# Altium PCB TX.PcbDoc
Units mm, origin at the board's own origin, x right, y up, seen from the top; angles counter-clockwise.
Board outline 80 x 26 mm, 2 copper layers (Top Layer, Bottom Layer); 49 components, 37 nets, 205 pads, 55 vias.
Unrouted connection lines stored in the file: 54.
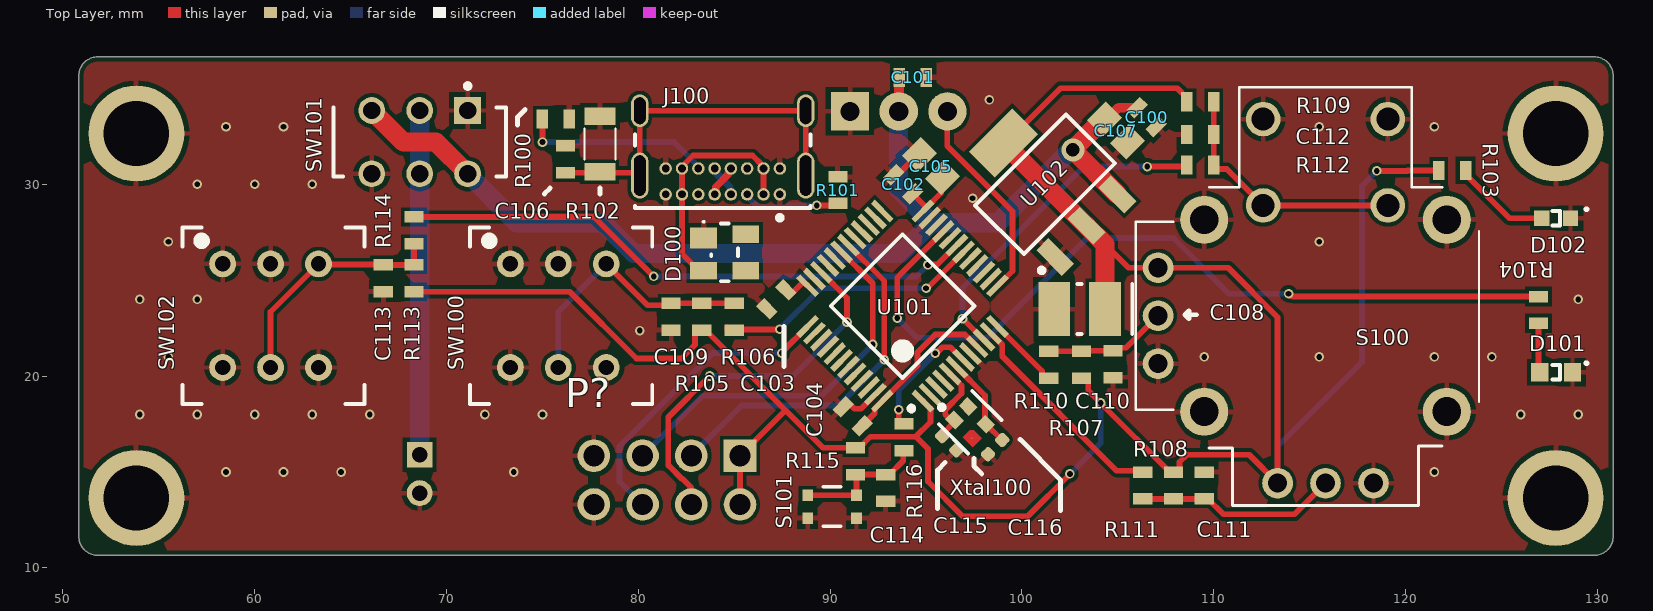
[diagram p0: Top Layer view]
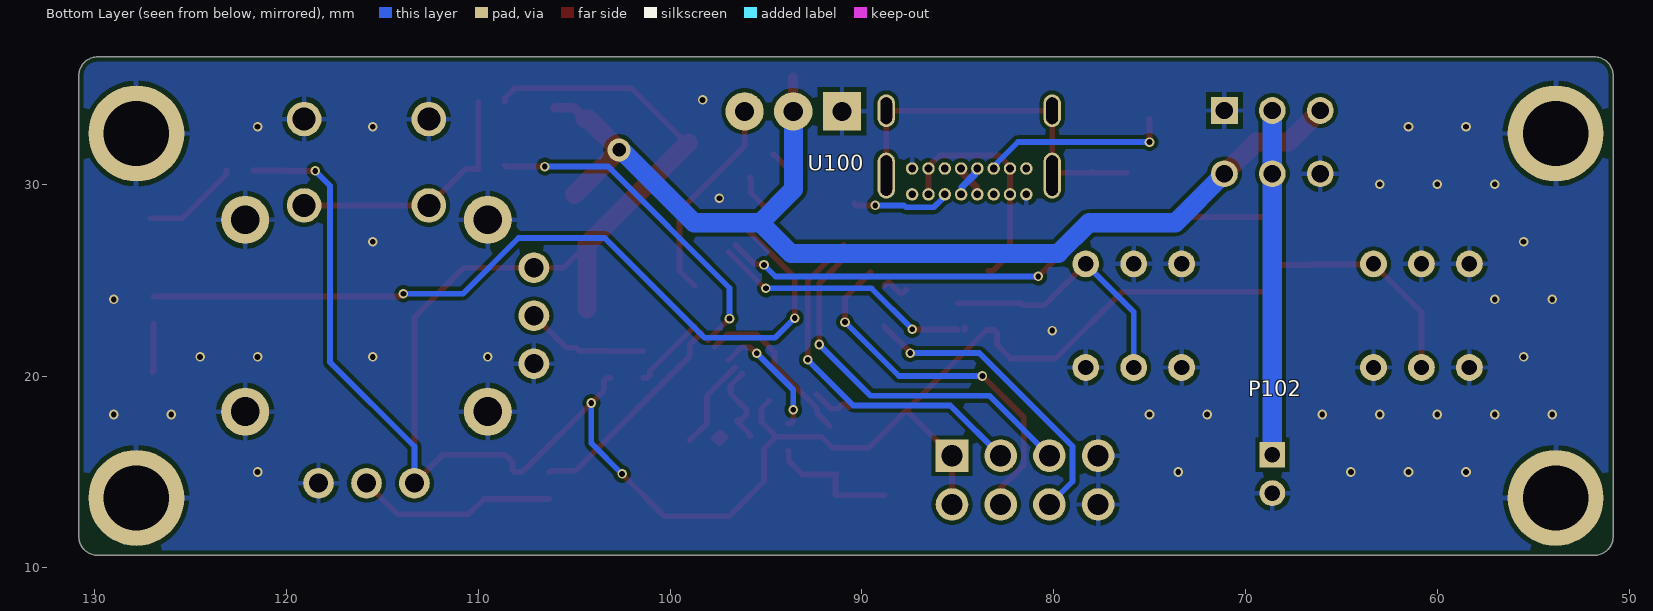
[diagram p1: Bottom Layer view, seen from below]

## Layer stack, top to bottom
Top Solder: solder mask 0.0102, Solder Resist, Dk 3.5
Top Layer: signal copper 0.0356
Dielectric 1: dielectric 0.32, FR-4, Dk 4.8
Bottom Layer: signal copper 0.0356
Bottom Solder: solder mask 0.0102, Solder Resist, Dk 3.5

## Board outline
50.825,11.65 ccw(c51.825,11.65) 51.825,10.65 129.825,10.65 ccw(c129.825,11.65) 130.825,11.65 130.825,35.65 ccw(c129.825,35.65) 129.825,36.65 51.825,36.65 ccw(c51.825,35.65) 50.825,35.65

## Design rules (kind name [scope] priority, off if disabled: settings)
BoardOutlineClearance [All] p1: gap=0.254 ignorepadtopadclearanceinfootprint=FALSE except(0: Arc-SplitContinuation Track-SplitContinuation SMDPad-SplitContinuation THPad-SplitContinuation Via-SplitContinuation Fill-SplitContinuation Poly-SplitContinuation Region-SplitContinuation Text-SplitContinuation)
Clearance [All] p1: gap=0.2 ignorepadtopadclearanceinfootprint=FALSE
DiffPairsRouting [All] p1: maxlimit=0.254 minlimit=0.254 mostfreqgap=0.254 toplayer_minwidth=0.381 toplayer_maxwidth=0.381 toplayer_prefwidth=0.381 bottomlayer_minwidth=0.381 bottomlayer_maxwidth=0.381 bottomlayer_prefwidth=0.381 maxuncoupledlength=12.7
PolygonConnect 7V_Poly [IsNamedPolygon('7V')] p1: connectstyle=Relief reliefconductorwidth=1 reliefentries=2 polygonreliefangle="90 Angle" airgapwidth=0.254
PolygonConnect [All] p2: thpad.connectstyle=Relief thpad.reliefconductorwidth=0.254 thpad.reliefentries=4 thpad.polygonreliefangle="90 Angle" thpad.airgapwidth=0.254 smdpad.connectstyle=Relief smdpad.reliefconductorwidth=0.254 smdpad.reliefentries=4 smdpad.polygonreliefangle="90 Angle" smdpad.airgapwidth=0.254 via.connectstyle=Direct via.reliefconductorwidth=0.254 via.reliefentries=4 via.polygonreliefangle="90 Angle" via.airgapwidth=0.254
RoutingVias [All] p1: holewidth=0.3 width=0.5 viastyle="Through Hole" minholewidth=0.3 minwidth=0.5 maxholewidth=0.3 maxwidth=1 viatemplateguid#1={624E91B9-952A-4740-B797-111CA46E8F32} viatemplatename#1=v50h30
SolderMaskExpansion [All] p1: expansion=0.102 istentingtop=FALSE
SupplyNets "Schematic Supply Nets_3" [InNet('5V')] p1: voltage=0.000
SupplyNets "Schematic Supply Nets_2" [InNet('7.4V')] p2: voltage=0.000
SupplyNets "Schematic Supply Nets_1" [InNet('GND')] p3: voltage=0.000
Width [All] p1: maxlimit=2 minlimit=0.3 preferedwidth=0.3
29 further rules are at their usual default settings.

## Classes and differential pairs
differential pair USB_D: +USB_D_P -USB_D_N

## Components (designator, comment, footprint, x,y, rotation, side; value= is the part's Value field where it differs from the comment)
C100 "1u" MLCC_0603_M 106.5,33.5 r135 top value=1µF
C101 "100n" MLCC_0603_M 94.3,35.575 r180 top value=100nF
C102 "100n" MLCC_0603_M 93.8,30 r135 top value=100nF
C103 "100n" MLCC_0603_M 87.2,24 r225 top value=100nF
C104 "100n" MLCC_0603_M 91.175,17.9 r135 top value=100nF
C105 "4.7u" MLCC_0805_M 95.25,30.95 r315 top value=4.7µF
C106 "1n" MLCC_0603_M 76.2,31.3 r270 top value=1nF
C107 "10u" MLCC_0805_M 104.9,32.8 r135 top value=10µF
C108 "TCJB226M025R0150" 1210_Tantalum 103,23.5 r180 top value=22µF
C109 "100n" MLCC_0603_M 81.7,23.1 r90 top value=100nF
C110 "100n" MLCC_0603_M 104.75,20.625 r90 top value=100nF
C111 "100n" MLCC_0603_M 109.5,14.3 r270 top value=100nF
C112 "100n" MLCC_0603_M 109.3,32.6 r0 top value=100nF
C113 "100n" MLCC_0603_M 66.7,25.1 r90 top value=100nF
C114 "100n" MLCC_0603_M 92.897,14.171 r90 top value=100nF
C115 "15p" MLCC_0402_M 96.2,16.5 r135 top value=15pF
C116 "15p" MLCC_0402_M 98.6,16.3 r45 top value=15pF
D100 "SP0503BAHT" LFUS-SOT143-4_V 84.5,26.45 r0 top value=30pF
D101 "Green" "0603 LED" 127.85,20.2 r0 top
D102 "Red" "0603 RED LED" 127.85,28.225 r0 top
J100 "USB4085-GF-A" FP-USB4085-GF-A-MFG 84.4,33.5 r180 top
P102 "S2B-PH-K-S(LF)(SN)" B5B-PH-K-S(LF)(SN) 69.15,14.9 r270 bottom
P? "8 Pos Vertical Pin Header" "8 POS Vertical Pin Header" 81.49,14.58 r180 top
R100 "5.1k" Resistor_0603_M 75.7,33.4 r180 top value=5,1k
R101 "5.1k" Resistor_0603_M 90.4,29.7 r90 top value=5,1k
R102 "1M" Resistor_1206_M 78,32.1 r270 top
R103 "200R" Resistor_0603_M 122.425,30.725 r0 top value=200
R104 "200R" Resistor_0603_M 126.925,23.45 r270 top value=200
R105 "10k" Resistor_0603_M 83.3,23.1 r270 top
R106 "100R" Resistor_0603_M 85,23.1 r270 top value=100
R107 "10k" Resistor_0603_M 103.1,20.6 r270 top
R108 "10k" Resistor_0603_M 107.9,14.3 r90 top
R109 "10k" Resistor_0603_M 109.3,34.3 r180 top
R110 "100R" Resistor_0603_M 101.4,20.6 r270 top value=100
R111 "100R" Resistor_0603_M 106.3,14.3 r90 top value=100
R112 "100R" Resistor_0603_M 109.3,31 r180 top value=100
R113 "10k" Resistor_0603_M 68.3,25.1 r270 top
R114 "100R" Resistor_0603_M 68.3,27.6 r90 top value=100
R115 "10k" Resistor_0603_M 91.322,15.571 r90 top
R116 "100R" Resistor_0603_M 93.847,16.821 r90 top value=100
S100 "THB001P" THB001P 115.825,23.15 r0 top locked value=10kR
S101 "USLPT2819DT4TR" USLPT2819DT4TR-Footprint-1 90.097,13.196 r180 top
SW100 "TL2201EEXB" TL2201EEXB-Footprint-1 75.825,23.15 r0 top
SW101 "JS202011CQN" FP-JS202011CQN-MFG 68.6,32.2 r180 top
SW102 "TL2201EEXB" TL2201EEXB-Footprint-1 60.825,23.15 r0 top
U100 "FS1000A" "2.54mm 3-pin horizontal" 93.575,39 r0 bottom
U101 "STM32F103C6T6A" STM-LQFP48_M 93.775,23.65 r135 top
U102 "AMS1117-5.0" SOT230P700X180-4N 101.2,30 r135 top
Xtal100 "ABM11-16.000MHZ-12-N1G-T" FP-ABM11-MFG 97.3,17.6 r315 top

## Footprints (in the part's own frame and the unit in brackets; to place one, negate y for a bottom-side part, rotate by r counter-clockwise, add the part's x,y. Pads: shape width x height; smd on the part's side, far side on the other; paste and mask are expansions set on the pad)
"2.54mm 3-pin horizontal" [mm]
  rect 2x2 hole 1: 1(-2.54,5.2)
  round 2 hole 1: 2(0,5.2) 3(2.54,5.2)
  body extent -8.51,-26.2 10.6,5.4, height 3.35
"8 POS Vertical Pin Header" [mm]
  rect 1.7x1.7 hole 1.1: 1(-3.81,-1.27)
  round 1.7 hole 1.1: 2(-3.81,1.27) 3(-1.27,-1.27) 4(-1.27,1.27) 5(1.27,-1.27) 6(1.27,1.27) 7(3.81,-1.27) 8(3.81,1.27)
  body extent -5.08,-2.51 5.08,2.49, height 8.03
"0603 LED" [mm] "Generic 0603 LED"
  rect 0.9x0.95 smd: 1(0.85,0) 2(-0.85,0)
  silkscreen extent -0.2,-0.38 1.6,0.5, body extent -0.8,-0.4 0.8,0.4, height 0.38
"0603 RED LED" [mm] "Generic 0603 RED LED"
  rect 0.8x0.8 smd: 1(0.75,0) 2(-0.75,0)
  silkscreen extent -0.2,-0.38 1.6,0.5, body extent -0.8,-0.4 0.8,0.4, height 0.4
1210_Tantalum [mm] "Chip Capacitor, 2-Leads, Body 3,20x2,50mm, IPC Medium Density"
  rect 1.65x2.8 smd: 1(-1.325,0) 2(1.325,0)
  silkscreen extent -2.75,-1.3 0.1,1.3, body extent -1.85,-1.43 1.85,1.5, height 2.06
B5B-PH-K-S(LF)(SN) [mm]
  rect 1.35x1.35 hole 0.8: 1(-1,0.55)
  round 1.35 hole 0.8: 2(1,0.55)
  body extent -2.92,-5.73 2.98,1.87, height 4.8
FP-ABM11-MFG [mm]
  rect 0.75x0.65 smd paste+0 mask+0: 1(-0.65,-0.5) 3(0.65,0.5) 4(-0.65,0.5)
  round 0.025 smd paste+0 mask+0: 2(0.65,-0.525)
  Top Layer region: 0.275,-0.325 0.425,-0.175 1.025,-0.175 1.025,-0.825 0.275,-0.825
  silkscreen extent -1.72,-1.22 1.07,1.22, body extent -1.18,-0.97 1.18,0.97, height 0.25
FP-JS202011CQN-MFG [mm]
  rect 1.4x1.4 hole 0.9 paste-2539.97 mask+0: 1(-2.5,-1.65)
  round 1.4 hole 0.9 paste-2539.97 mask+0: 2(0,-1.65) 3(2.5,-1.65) 4(2.5,1.65) 5(0,1.65) 6(-2.5,1.65)
  silkscreen extent -4.5,-3.05 4.5,1.8, body extent -4.6,-2.45 4.6,2.45, height 0.25
FP-USB4085-GF-A-MFG [mm]
  rrect100% 0.9x2.4 hole 2.1 slot 0.6 at 0 deg paste-2539.97 mask+0: 1(-4.325,3.045) 2(4.325,3.045)
  rrect100% 0.9x1.7 hole 1.4 slot 0.6 at 0 deg paste-2539.97 mask+0: 3(-4.325,-0.335) 4(4.325,-0.335)
  round 0.65 hole 0.4 paste-2539.97 mask+0: A1(-2.975,4.025) A4(-2.125,4.025) A5(-1.275,4.025) A6(-0.425,4.025) A7(0.425,4.025) A8(1.275,4.025) A9(2.125,4.025) A12(2.975,4.025) B1(2.975,2.675) B4(2.125,2.675) B5(1.275,2.675) B6(0.425,2.675) B7(-0.425,2.675) B8(-1.275,2.675) B9(-2.125,2.675) B12(-2.975,2.675)
  silkscreen extent -4.57,0.89 4.57,5.37, body extent -4.87,-4.83 4.87,4.83, height 0.25
LFUS-SOT143-4_V [mm] "SOT143, 4-Leads, Body 3.04x1.4mm, Pitch 1.90mm"
  rect 1.4x1.1 smd: 1(-1.1,0.75)
  rect 1.4x0.9 smd: 2(-1.1,-0.95) 3(1.1,-0.95) 4(1.1,0.95)
  silkscreen extent -1.15,-1.5 0.7,1.65, body extent -0.7,-1.52 0.7,1.52, height 1.22
MLCC_0402_M [mm]
  rrect49% 0.63x0.61 smd: 1(-0.525,0) 2(0.525,0)
  body extent -0.5,-0.25 0.5,0.25, height 0.55
MLCC_0603_M [mm]
  rect 0.6x1 smd: 1(-0.7,0) 2(0.7,0)
  body extent -0.8,-0.4 0.8,0.4, height 0.92
MLCC_0805_M [mm] "Chip Capacitor, 2-Leads, Body 2,00x1,25mm, IPC Medium Density"
  rect 1.2x1.4 smd: 1(-0.85,0) 2(0.85,0)
  body extent -1.05,-0.67 1.05,0.67, height 1.35
Resistor_0603_M [mm]
  rect 0.6x1 smd: 1(-0.7,0) 2(0.7,0)
  body extent -0.8,-0.4 0.8,0.4, height 0.45
Resistor_1206_M [mm]
  rect 0.9x1.6 smd: 1(-1.45,0) 2(1.45,0)
  silkscreen extent -0.8,-0.8 0.8,0.8, body extent -1.6,-0.83 1.6,0.83, height 0.56
SOT230P700X180-4N [mm] "SOT-223 based on AP2114H-3.3TRG1"
  rect 1.9x0.9 smd: 1(-3.05,2.3) 2(-3.05,0) 3(-3.05,-2.3)
  rect 1.9x3.2 smd: 4(3.05,0)
  silkscreen extent -3.17,-3.35 1.8,3.42, body extent -3.5,-3.35 3.5,3.35, height 1.8
STM-LQFP48_M [mm] "QFP, 48-Leads, Body 7x7mm, Pitch 0.5mm, IPC Low Density"
  rect 1.4x0.3 smd: 1(-4.25,2.75) 2(-4.25,2.25) 3(-4.25,1.75) 4(-4.25,1.25) 5(-4.25,0.75) 6(-4.25,0.25) 7(-4.25,-0.25) 8(-4.25,-0.75) 9(-4.25,-1.25) 10(-4.25,-1.75) 11(-4.25,-2.25) 12(-4.25,-2.75) 25(4.25,-2.75) 26(4.25,-2.25) 27(4.25,-1.75) 28(4.25,-1.25) 29(4.25,-0.75) 30(4.25,-0.25) 31(4.25,0.25) 32(4.25,0.75) 33(4.25,1.25) 34(4.25,1.75) 35(4.25,2.25) 36(4.25,2.75)
  rect 0.3x1.4 smd: 13(-2.75,-4.25) 14(-2.25,-4.25) 15(-1.75,-4.25) 16(-1.25,-4.25) 17(-0.75,-4.25) 18(-0.25,-4.25) 19(0.25,-4.25) 20(0.75,-4.25) 21(1.25,-4.25) 22(1.75,-4.25) 23(2.25,-4.25) 24(2.75,-4.25) 37(2.75,4.25) 38(2.25,4.25) 39(1.75,4.25) 40(1.25,4.25) 41(0.75,4.25) 42(0.25,4.25) 43(-0.25,4.25) 44(-0.75,4.25) 45(-1.25,4.25) 46(-1.75,4.25) 47(-2.25,4.25) 48(-2.75,4.25)
  silkscreen extent -4.22,-2.65 2.65,3.57, body extent -3.5,-3.5 3.5,3.5, height 1.6
THB001P [mm]
  round 1.8 hole 1.2: B1A(-3.25,10.25) B1B(3.25,10.25) B2A(-3.25,5.75) B2B(3.25,5.75)
  round 1.6 hole 1: H1(-2.5,-8.73) H2(0,-8.73) H3(2.5,-8.73) V1(-8.73,2.5) V2(-8.73,0) V3(-8.73,-2.5)
  round 2.5 hole 1.5: S1(-6.325,5) S2(-6.325,-5) S3(6.325,-5) S4(6.325,5)
  silkscreen extent -9.9,-9.9 8,11.9, body extent -9.67,-9.67 7.6,11.6, height 19.5
TL2201EEXB-Footprint-1 [mm]
  round 1.4 hole 0.8: 1(-2.5,2.7) 2(0,2.7) 3(2.5,2.7) 4(-2.5,-2.7) 5(2.5,-2.7) 6(0,-2.7)
  silkscreen extent -4.6,-4.6 4.9,4.6, body extent -4.25,-4.25 4.55,4.25, height 14.2
USLPT2819DT4TR-Footprint-1 [mm]
  rect 0.55x0.6 smd: 1(-1.275,0.6) 2(1.275,0.6) 3(-1.275,-0.59) 4(1.275,-0.59)
  silkscreen extent -0.46,-1.02 0.46,1.03, body extent -1.5,-0.94 1.5,0.96, height 0.43

## Part data
C100: library part CMP-001-0565-1, "MLCC, 0603, 1u, 10%, 50V, X5R", Capacitor Type=Ceramic, Case/Package=0603, Dielectric=X5R, Manufacturer=Any, Tolerance=10%, Voltage=50V, Mount=SMD, Part number="MLCC, 0603, 1u, 10%, 50V, X5R", RoHS=Yes
C101 C102 C103 C104 C109 C110 C111 C112 C113 C114: library part CMP-001-0815-1, "MLCC, 0603, 100n, 10%, 50V, X7R", Capacitor Type=Ceramic, Case/Package=0603, Dielectric=X7R, Manufacturer=Any, Tolerance=10%, Voltage=50V, Mount=SMD, Part number="MLCC, 0603, 100n, 10%, 50V, X7R", RoHS=Yes
C105: library part CMP-001-1830-1, "MLCC, 0805, 4.7u, 20%, 50V, X5R", Capacitor Type=Ceramic, Case/Package=0805, Dielectric=X5R, Manufacturer=Any, Tolerance=20%, Voltage=50V, Mount=SMD, Part number="MLCC, 0805, 4.7u, 20%, 50V, X5R", RoHS=Yes
C106: library part CMP-001-0786-1, "MLCC, 0603, 1n, 10%, 50V, X7R", Capacitor Type=Ceramic, Case/Package=0603, Dielectric=X7R, Manufacturer=Any, Tolerance=10%, Voltage=50V, Mount=SMD, Part number="MLCC, 0603, 1n, 10%, 50V, X7R", RoHS=Yes
C107: library part CMP-001-0829-2, "MLCC, 0805, 10u, 10%, 50V, X5R", Capacitor Type=Ceramic, Case/Package=0805, Dielectric=X5R, Manufacturer=Any, Tolerance=10%, Voltage=50V, Mount=SMD, Part number="MLCC, 0805, 10u, 10%, 50V, X5R", RoHS=Yes
C108: library part CMP-0001-00036-4, "Cap Tant Solid 22uF 25V B CASE 20% (3.5 X 2.8 X 1.9mm) SMD 3528-21 0.15 Ohm 105°C T/R", Capacitance=22uF, Capacitor Type=Molded, Case Code (Imperial)=1210, Case Code (Metric)=3528, Dielectric=X5R, ESR (Equivalent Series Resistance)=150mR, Manufacturer="AVX Corporation", Max Operating Temperature=105°C, Min Operating Temperature=-55°C, Package Quantity=2000, Tolerance=20%, Voltage Rating=25V, Case/Package=1210, Depth=2.8mm, Features="General Purpose", Height=1.9mm, Height - Seated (Max)=0.083inch, Length=0.138inch, Life (Hours)=2000Hour, Mount="Surface Mount", Packaging="Tape and Reel", Part number=TCJB226M025R0150, Radiation Hardening=No, REACH SVHC="No SVHC", RoHS=Yes, Termination=SMD/SMT, Voltage Rating (DC)=25V, Width=0.11inch
C115 C116: library part CMP-001-1853-1, "MLCC, 0402, 15p, 10%, 25V, C0G/NP0", Capacitance=15pF, Capacitor Type=Ceramic, Case Code (Imperial)=0402, Case Code (Metric)=1005, Dielectric=C0G, Manufacturer=Any, Max Operating Temperature=125°C, Min Operating Temperature=-55°C, Package Quantity=1, Temperature Coefficient=300ppm/°C, Tolerance=10%, Voltage=25V, Voltage Rating=25, Case/Package=0402, Contact Plating=Tin, Depth=0.5mm, Height=0.5mm, Length=1mm, Material=Ceramic, Mount="Surface Mount", Packaging="Tape and Reel", Part number="MLCC, 0402, 15p, 10%, 25V, C0G/NP0", Radiation Hardening=No, RoHS=Yes, Thickness=0.022inch, Width=0.02inch
D100: library part CMP-ROOT-01259-1, "SP050xBA Series 8.5 V 30 pF Triple Uni-Directional TVS Avalanche Diode-SOT143-4", Breakdown Voltage=5.5V, Case/Package=SOT-143, Clamping Voltage=6.8V, Leakage Current=100nA, Manufacturer="Littelfuse Inc.", Max Operating Temperature=125°C, Max Power Dissipation=225mW, Min Operating Temperature=-40°C, Power Line Protection=No, Voltage Rating (DC)=5V, China RoHS=Compliant, Composition=Zener, Depth=1.4mm, Diode Type=Avalanche, Direction=Unidirectional, Element Configuration="Common Anode", ESD Protection=Yes, Height=1.22mm, Lead Free="Lead Free", Length=3.04mm, Lifecycle Status=Production, Max Reverse Leakage Current=100nA, Mount=SMD, Mounting Technology="Surface Mount", Number of Channels=3, Number of Elements=3, Number of Terminals=4, Number of Unidirectional Channels=3, Operating Supply Voltage=5.5V, Part number=SP0503BAHT, Peak Pulse Power=225mW, Pins=4, Polarity=Unidirectional, Power Dissipation=225mW, Radiation Hardening=No, REACH SVHC=Yes, Reverse Standoff Voltage=5.5V, RoHS=Compliant, Schedule B="8536300000, 8536300000", Termination=SMD/SMT, Width=1.4mm, Working Voltage=5.5V
D101: library part CMP-ROOT-00024-1, "Generic green 0603 LED", Case/Package=0603, Manufacturer=Any, Part number="Any Green 0603 LED", Color=Green, Mount=SMD, RoHS=Yes
D102: library part CMP-ROOT-00025-2, "Generic red 0603 LED", Case/Package=0603, Manufacturer=Any, Part number="Any Red 0603 LED", Color=Red, Mount=SMD, RoHS=Yes
J100: library part CMP-001-1800-1, "USB Connector, 16 Contact(s), Female, Right Angle, Solder Terminal, Locking, Receptacle", Current Rating=4.25A, Flammability Rating="UL94 V-0", Insulation Color=Black, Manufacturer=GCT, Max Operating Temperature=85°C, Min Operating Temperature=-40°C, Part number=USB4800-03-A, Voltage Rating=20V, Connector Type=USB, Contact Material="Copper Alloy", Contact Plating=Gold, Gender=Receptacle, Height=3.66mm, Mating Cycles=10000, Mount=TH, Mounting Technology="Through Hole,Horizontal", Number of Contacts=16, Number of Ports=1, Number of Positions=16, Orientation="Right Angle", Packaging="Tape and Reel", Pins=16, RoHS=Yes, Series=USB4085, Shielding=Shielded, Standoff Height=3.5mm, Termination=Solder, USB PD=3.2, USB Standard="USB 2.0"
P102: library part CMP-ROOT-00728-2, "Conn Shrouded Header (4 Sides) HDR 2 POS 2mm Solder RA Thru-Hole Box", Color=Natural,White, Contact Resistance=20mR, Current Rating=2A, Flammability Rating="UL94 V-0", Housing Color=White, Insulation Resistance=1GR, Manufacturer="JST Sales America Inc.", Max Operating Temperature=85°C, Max Voltage Rating (AC)=100V, Min Operating Temperature=-25°C, Connector Type="Male Pin", Contact Material=Tin,Brass,Bronze, Contact Mating Length=0.13inch, Contact Plating=Tin,Copper, Contact Type="Male Pin", Depth=7.6mm, Fastening Type=Detent, Gender=Male, Height=9.4mm, Housing Material=Polyamide, Lead Free="Lead Free", Lead Pitch=2mm, Length=5.9mm, Max Current Rating=2A, Max Voltage Rating (DC)=100V, Mount="Through Hole", Number of Contacts=2, Number of Pins=2, Number of Poles=2, Number of Positions=2, Number of Rows=1, Orientation="Right Angle", Packaging=Bulk, Part number=S2B-PH-K-S(LF)(SN), Pitch=2mm, REACH SVHC="No SVHC", RoHS=Yes, Series=PH, Termination=Solder, Voltage Rating=100V, Voltage Rating (AC)=100V, Width=4.5mm, Working Voltage=100V
P?: library part CMP-ROOT-00235-2, "Connector Header Through Hole 8 position 0.100\" (2.54mm)", Color=Black, Current Rating=3A, Insulation Resistance=5GR, Manufacturer="Amphenol ICC (FCI)", Max Operating Temperature=125°C, Max Voltage Rating (AC)=1.5kV, Min Operating Temperature=-65°C, Package Quantity=100, Part number=67997-208HLF, Connector Type="Male Pin", Contact Gender=Male, Contact Material=Bronze, Contact Mating Length=0.23inch, Contact Plating=Gold,GXT, Contact Post Length=3.05mm, Depth=4.83mm, Gender=Male, Housing Color=Black, Housing Material=Thermoplastic, Length=10.16mm, Mount="Through Hole", Number of Contacts=8, Number of Positions=8, Number of Rows=2, Orientation=Straight, Packaging=Bulk, Pins=8, Pitch=2.54mm, Radiation Hardening=No, REACH SVHC="No SVHC", RoHS=Yes, Row Spacing=0.1inch, Termination=Solder, Voltage Rating=1.5kV
R100 R101: library part CMP-001-0094-2, "Resistor, 0603, 5.1k, 1%, 1/10W", Case/Package=0603, Manufacturer=Any, Power=100mW, Tolerance=1%, Mount=SMD, Part number="Resistor, 0603, 5.1k, 1%, 1/10W", RoHS=Yes
R102: library part CMP-0001-00051-1, "Resistor, 1206, 1M, 1%, 1/4W", Case/Package=1206, Manufacturer=Any, Mount=SMD, Part number=Any, RoHS=Yes
R103 R104: library part CMP-001-0060-2, "Resistor, 0603, 200R, 1%, 1/10W", Case/Package=0603, Manufacturer=Any, Power=100mW, Tolerance=1%, Mount=SMD, Part number="Resistor, 0603, 200R, 1%, 1/10W", RoHS=Yes
R105 R107 R108 R109 R113 R115: library part CMP-001-0101-2, "Resistor, 0603, 10k, 1%, 1/10W", Case/Package=0603, Manufacturer=Any, Power=100mW, Tolerance=1%, Mount=SMD, Part number="Resistor, 0603, 10k, 1%, 1/10W", RoHS=Yes
R106 R110 R111 R112 R114 R116: library part CMP-001-0054-5, "Resistor, 0603, 100R, 1%, 1/10W", Case/Package=0603, Manufacturer=Any, Power=100mW, Tolerance=1%, Mount=SMD, Part number="Resistor, 0603, 100R, 1%, 1/10W", RoHS=Yes
S100: library part CMPL-001-A00000-7, "Multi-Directional Thumbstick, 2 Axis, Center Momentary Switch, 12VDC, THB Series", Manufacturer=Littelfuse, Max Operating Temperature=70°C, Min Operating Temperature=-10°C, Operating Force=715gf, Package=None, Voltage Rating (DC)=12V, Actuator Type=Joystick, Mount=TH, Mounting Technology="Through Hole", Part number=THB001P, Pins=12, Price=None, RoHS=Yes, Termination="PC Pin"
S101: library part CMP-ROOT-01290-1, "Keypad Switch, SPST, 0.05A, 1.96N, Solder Terminal, Panel Mount", Case/Package=Non-standard, Color=Black, Contact Current Rating=50mA, Manufacturer="TE Connectivity ALCOSWITCH Switches", Max Operating Temperature=85°C, Min Operating Temperature=-40°C, Operating Force=1.96N, China RoHS=Compliant, Contact Material="Stainless Steel", Contact Plating=Silver, Housing Material=Polyethylene, Lifecycle Status=Production, Max Current Rating=50mA, Mount=SMD, Packaging="Tape & Reel", Part number=USLPT2819DT4TR, REACH SVHC=Yes, RoHS=Compliant, Throw Configuration=SPST
SW100 SW102: library part CMP-ROOT-01258-1, "Pushbutton Switch, DPDT, ON-ON, 100 mA, 30V DC, PC Pin, TL2201 Series", Case/Package=Non-standard, Contact Resistance=100mΩ, Current Rating=100mA, Insulation Resistance=100MΩ, Manufacturer=E-Switch, Max Voltage Rating (DC)=30V, Actuator Length=5.5118mm, Actuator Material=Acetal, Contact Plating=Silver, Electrical Life=10kcycles, Height=8.509mm, Length=8.509mm, Lifecycle Status=Production, Max Current Rating=100mA, Mount=TH, Mounting Technology="Through Hole", Number of Positions=2, Part number=TL2201EEXB, Pins=6, REACH SVHC=Yes, RoHS=Compliant, Switch Function=On-On, Termination="PC Pin", Throw Configuration=DPDT, Voltage Rating (DC)=30V
SW101: library part CMP-ROOT-01260-1, "Slide Switch, 1 Positions, Dpdt, Latched, 0.3A, 6Vdc, 6 Pcb Hole Cnt, Solder Terminal, Through", Case/Package=Non-standard, Color=Black, Contact Current Rating=300mA, Contact Resistance=70mΩ, Flammability Rating="UL94 V-0", Insulation Resistance=100MΩ, Manufacturer=C&K, Max Operating Temperature=85°C, Max Voltage Rating (DC)=6V, Min Operating Temperature=-40°C, Actuator Length=2.0066mm, Actuator Material=Nylon, Contact Plating=Silver, Current Rating=300mA, Depth=3.6mm, Electrical Life=5kcycles, Height=3.5mm, Housing Material=Nylon, Illumination Type=Non-Illuminated, Lead Free="Lead Free", Length=9mm, Life (Cycles)=5kcycles, Lifecycle Status=Production, Max Current Rating=300mA, Mount=SMD, Mounting Technology="Through Hole", Number of Positions=1, Orientation=Vertical, Packaging=Bulk, Part number=JS202011CQN, Pins=6, Radiation Hardening=No, REACH SVHC=Yes, RoHS=Compliant, Switch Function=On-On, Switch Travel=2mm, Terminal Material=Brass, Termination="PC Pins", Throw Configuration=DPDT, Voltage Rating (DC)=6V
U100: library part CMP-ROOT-01261-3, "FS1000A 433MHZ RF transmitter & XY-MK-5V Receiver Module", Case/Package=Non-standard, Manufacturer=-, Mount=SMD, Part number=FS1000A, Pins=3, RoHS=Yes
U101: library part CMP-00012-1, "MCU 32-bit STM32F ARM Cortex M3 RISC 32KB Flash 2.5V/3.3V 48-Pin LQFP Tray", Case/Package=LQFP, Clock Frequency=16MHz, Frequency=72MHz, Manufacturer=STMicroelectronics, Max Operating Temperature=85°C, Max Power Dissipation=363mW, Max Supply Current=45mA, Max Supply Voltage=3.6V, Min Operating Temperature=-40°C, Min Supply Voltage=2V, Nominal Supply Current=1.55µA, Operating Supply Voltage=3.3V, Part number=STM32F103C8T6, Address Bus Width=32b, China RoHS=Compliant, Core Architecture=ARM, Data Bus Width=32b, Flash Memory Size=32kB, Height=1.45mm, Interface="CAN, I2C, IrDA, LIN, SPI, UART, USART, USB", Lead Free="Lead Free", Length=7mm, Lifecycle Status=Production, Memory Format=FLASH, Memory Size=32kB, Mount=SMD, Number of A/D Converters=2, Number of ADC Channels=10, Number of Channels=10, Number of I2C Channels=1, Number of I/Os=37, Number of Programmable I/O=37, Number of SPI Channels=1, Number of Terminals=48, Number of Timers/Counters=3, Number of USART Channels=2, Oscillator Type=Internal, Peripherals="DMA, I2C, POR, PWM, Temp Sensor, WDT", Pins=48, Radiation Hardening=No, RAM Size=10kB, REACH SVHC=Yes, RoHS=Compliant, Schedule B=8542310000, Terminal Pitch=500µm, Watchdog Timer=Yes, Width=7mm
U102: library part CMP-00014-1, "LDO Regulator Pos 5V 1A 4-Pin(3+Tab) SOT-223 / 1A LOW DROPOUT VOLTAGE REGULATOR", Case/Package=SOT-223, Current Output=1A, Manufacturer=EVVO, Voltage Dropout (Max)="1.3V @ 1A", Voltage Input (Max)=12V, Voltage Output (Mix/Fixed)=5V, Mount=SMD, Output Type=Fixed, Part number=AMS1117-5.0, REACH SVHC=Yes, RoHS=Compliant
Xtal100: library part CMP-ROOT-01254-3, "Crystal 16MHz ±10ppm (Tol) ±15ppm (Stability) 12pF FUND 150Ohm 4-Pin Ultra Mini-CSMD T/R", Case/Package="4-SMD, No Lead", ESR (Equivalent Series Resistance)=150Ω, Frequency=16MHz, Frequency Stability=15ppm, Frequency Tolerance=0.001%, Load Capacitance=12pF, Manufacturer="Abracon LLC", Max Operating Temperature=85°C, Min Operating Temperature=-30°C, China RoHS=Compliant, ESR=150Ω, Height=590µm, Length=2mm, Lifecycle Status=Production, Mount=SMD, Mounting Technology="Surface Mount", REACH SVHC=Yes, RoHS=Compliant, Schedule B=8541600080, Tolerance=0.001%, Width=1.6mm

## Free pads (board coordinates)
  round 5 hole 3.4: 1(53.825,13.65) 1(53.825,32.65) 1(127.825,13.65) 1(127.825,32.65)

## Via types
v1: diameter 0.5, hole 0.3, Top Layer to Bottom Layer, 54 vias
v2: diameter 1.2, hole 0.7, Top Layer to Bottom Layer, 1 vias

## Nets (pads, with @x,y where several pads share a name; then routed paths per layer and width w, separated by ;. In a path a pad name is that pad's centre, name@x,y a point inside that pad or via, vN(x,y) a via of type N, cw(c..) or ccw(c..) an arc to the next point about the centre after c; other vN are vias at no path point)
5V: C108.1 P?.1 P?.2 R103.1 R105.2 R107.2 R108.2 R109.2 R113.2 R115.2 S100.H1 S100.V1 U101.1 U102.2 U102.4 | length 132.3
  Top Layer w0.3: R113.2 76.425,24.4 79.9,20.925 82.25,20.925 82.956,21.631 82.956,22.25 83.106,22.4 83.5,22.4 87.675,18.225 ; P?.2 P?.1 87.675,18.225 ; U101.1 95.225,18.311 95.225,17.603 94.466,16.845 ; U102.4 99.157,32.157 102.011,35.011 108.089,35.011 108.6,34.5 R109.2 ; v1(102.5,14.9) 100.3,12.7 96.9,12.7 95.1,14.5 95.1,16.212 94.466,16.845 ; R107.2 103.3,19.9 103.45,19.75 103.45,19.25 v1(104.1,18.6) 107.7,15 R108.2 108.1,15 108.218,15.118 108.218,15.518 108.6,15.9 111.845,15.9 S100.H1 113.325,18.648 113.325,23.075 110.75,25.65 S100.V1 105.55,25.65 104.325,26.875 ; v1(118.5,30.7) 120.082,30.7 120.107,30.725 R103.1 ; 87.675,18.225 89.629,16.271 R115.2 91.522,16.271 92.096,16.845 94.466,16.845
  Top Layer w1: U102.4 U102.2 104.325,26.875 C108.1
  Bottom Layer w0.3: v1(102.5,14.9) 104.1,16.5 v1(104.1,18.6) ; S100.H1 113.325,16.325 117.725,20.725 117.725,29.925 v1(118.5,30.7)
7.4V: C100.2 C101.2 C107.2 SW101.3 SW101.6 U100.2 U102.3 | length 57.7
  Top Layer w0.5: U100.2 93.587,33.813 93.587,35.563 C101.2 ; C107.2@104.44,33.401 105.034,33.995 C100.2
  Top Layer w1: SW101.3 67.75,32.2 69.45,32.2 SW101.6 ; C107.2@104.44,33.401 104.254,33.401 v2(102.653,31.8) U102.3
  Bottom Layer w1: SW101.6 73.65,28 78.155,28 79.755,26.4 93.7,26.4 95.3,28 ; U100.2 93.56,33.785 93.56,29.74 95.3,28 ; v2(102.653,31.8) 102.553,31.8 98.753,28 95.3,28
BAT_+: P102.1 SW101.2 SW101.5 | length 17.9
  Bottom Layer w1: P102.1 SW101.5 SW101.2
D_SCL: U101.45
D_SDA: U101.43
DBG_LED: R104.1 U101.21 | length 42.8
  Top Layer w0.3: v1(93.5,23.025) 93.5,25.143 U101.21 ; v1(113.9,24.3) 113.954,24.3 114.104,24.15 R104.1
  Bottom Layer w0.3: v1(93.5,23.025) 94.525,22 98.2,22 103.4,27.2 107.9,27.2 110.8,24.3 v1(113.9,24.3)
EN: R116.2 U101.7 | length 6.5
  Top Layer w0.3: v1(93.575,18.25) 93.575,17.671 93.725,17.521 R116.2 ; v1(95.478,21.187) 95.532,21.187 95.844,21.5 96.279,21.5 U101.7
  Bottom Layer w0.3: v1(93.575,18.25) 93.575,19.285 v1(95.478,21.187)
GND: C100.1 C101.1 C102.2 C103.2 C104.2 C105.1 C106.1 C107.1 C108.2 C109.1 C110.1 C111.1 C112.1 C113.1 C114.1 C115.1 C116.1 D100.1 D101.1 D102.1 J100.A1 J100.A12 J100.B1 J100.B12 P102.2 P?.7 P?.8 pad.1 R100.1 R101.2 R102.1 S100.B1A S100.B1B S100.H3 S100.S1 S100.S2 S100.S3 S100.S4 S100.V3 S101.1 S101.2 SW100.1 SW100.2 SW100.4 SW100.5 SW101.1 SW101.4 SW102.1 SW102.2 SW102.4 SW102.5 U100.1 U101.8 U101.23 U101.35 U101.47 U102.1 Xtal100.2 Xtal100.4 | length 3.9
  Top Layer w0.3: C104.2 90.821,18.536 91.034,18.536 91.267,18.303 91.61,18.303 U101.47 ; C102.2 93.517,30.495 93.783,30.761 94.573,31.551 C105.1
  other v1: 58.5,15 61.5,15 64.5,15 73.5,15 121.5,15 54,18 57,18 60,18 63,18 66,18 72,18 75,18 126,18 129,18 55.5,21 109.5,21 115.5,21 121.5,21 124.5,21 80.075,22.375 54,24 57,24 129,24 55.5,27 115.5,27 97.425,29.275 57,30 60,30 63,30 58.5,33 61.5,33 115.5,33 121.5,33 98.3,34.4
JOY_H: R111.2 U101.11 | length 11.3
  Top Layer w0.3: U101.11 98.969,21.638 98.969,21.031 104.929,15.071 106.229,15.071 R111.2
JOY_SEL: R112.2 U101.10 | length 17.5
  Top Layer w0.3: v1(96.9,23) U101.10 ; v1(106.525,30.923) 108.523,30.923 R112.2
  Bottom Layer w0.3: v1(96.9,23) 96.9,24.6 103.223,30.923 v1(106.525,30.923)
JOY_V: R110.2 U101.12 | length 3.9
  Top Layer w0.3: U101.12 101.05,20.264 101.05,20.05 101.2,19.9 R110.2
MCU_RX: P?.5 U101.31 | length 19.9
  Top Layer w0.3: U101.31 92.225,24.846 v1(92.225,21.65)
  Bottom Layer w0.3: P?.5 83.345,18.975 89.55,18.975 v1(92.225,21.65)
MCU_TX: P?.3 U101.30 | length 18.9
  Top Layer w0.3: U101.30 92.825,24.954 v1(92.825,20.85)
  Bottom Layer w0.3: P?.3 85.385,18.475 90.45,18.475 v1(92.825,20.85)
NetC102_1: C102.1 C105.2 U101.24 | length 3.5
  Top Layer w0.3: C102.1 U101.24@95.018,28.782 ; C105.2 95.78,30.278 95.78,29.544 U101.24@95.018,28.782 ; U101.24@95.018,28.782 U101.24 U101.24@95.018,28.782
NetC103_1: C103.1 U101.36 | length 1.5
  Top Layer w0.3: C103.1 87.836,24.354 88.049,24.354 88.615,24.92 U101.36
NetC104_1: C104.1 U101.9 U101.48 | length 8.8
  Top Layer w0.3: C104.1 92.327,18.062 92.327,18.31 92.325,18.311 94.55,20.536 94.55,21.25 95.475,22.175 97.018,22.175 U101.9
NetC106_2: C106.2 J100.1 J100.2 J100.3 J100.4 R102.2 | length 19.4
  Top Layer w0.3: C106.2 77.95,30.6 R102.2 78.05,30.6 79.93,30.6 J100.2 J100.4 J100.3 J100.1
NetC109_2: C109.2 R105.1 R106.1 SW100.3 SW100.6 | length 14
  Top Layer w0.3: SW100.3 80.475,23.7 81.6,23.7 C109.2 R106.1
  Bottom Layer w0.3: SW100.6 75.825,23.35 SW100.3
NetC110_2: C110.2 R107.1 R110.1 S100.V2 | length 6.5
  Top Layer w0.3: R110.1 103.3,21.3 103.325,21.325 C110.2 104.9,21.475 105.42,21.475 S100.V2
NetC111_2: C111.2 R108.1 R111.1 S100.H2 | length 10.5
  Top Layer w0.3: R111.1 R108.1 C111.2 109.7,13.6 110.5,12.8 114.205,12.8 S100.H2
NetC112_2: C112.2 R109.1 R112.1 S100.B2A S100.B2B | length 13.4
  Top Layer w0.3: R109.1 R112.1 110,30.8 110.675,30.8 S100.B2A S100.B2B
NetC113_2: C113.2 R113.1 R114.1 SW102.3 SW102.6 | length 12.5
  Top Layer w0.3: SW102.6 60.825,23.35 SW102.3 63.35,25.825 66.675,25.825 C113.2 R113.1 R114.1
NetC114_2: C114.2 R115.1 R116.1 S101.3 S101.4 | length 7
  Top Layer w0.3: S101.4 S101.3 91.372,14.821 R115.1 93.097,14.871 93.815,15.589 93.815,16.089 R116.1
NetC115_2: C115.2 U101.5 Xtal100.1 | length 4.4
  Top Layer w0.3: C115.2 95.829,16.96 96.487,17.618 Xtal100.1 96.294,17.706 96.002,17.998 96.002,18.247 96.847,19.092 96.847,19.517 U101.5
NetC116_2: C116.2 U101.6 Xtal100.3 | length 4.8
  Top Layer w0.3: U101.6 98.078,18.994 98.078,17.529 Xtal100.3 98.131,17.494 98.954,16.671 C116.2
NetD101_2: D101.2 R104.2 | length 2.6
  Top Layer w0.3: R104.2 126.925,20.275 D101.2
NetD102_2: D102.2 R103.2 | length 5.1
  Top Layer w0.3: R103.2 123.125,30.525 125.425,28.225 D102.2
NetJ100_A5: J100.A5 R101.1 | length 5.1
  Top Layer w0.3: v1(89.3,28.9) 90.3,28.9 R101.1
  Bottom Layer w0.3: J100.A5 85.675,29.38 85.85,29.205 85.85,29.195 86.245,28.8 87.696,28.8 87.796,28.9 v1(89.3,28.9)
NetJ100_B5: J100.B5 R100.2 | length 10
  Top Layer w0.3: v1(75,32.2) R100.2
  Bottom Layer w0.3: v1(75,32.2) 81.855,32.2 82.95,31.105 82.95,31.095 83.125,30.92 J100.B5
RF_DATA: U100.3 U101.13 | length 10.8
  Top Layer w0.3: U100.3 96.1,33.785 96.1,32 99.5,28.6 99.5,25.486 U101.13
SW_L: R106.2 U101.18 | length 13.8
  Top Layer w0.3: R106.2@84.65,22.4 R106.2@84.65,22.55 ; R106.2 85.025,22.425 87.35,22.425 v1(87.375,22.45) ; v1(95,24.575) 95.054,24.575 U101.18
  Bottom Layer w0.3: v1(87.375,22.45) 89.5,24.575 v1(95,24.575)
SW_R: R114.2 U101.19 | length 30.3
  Top Layer w0.3: R114.2 77.7,28.3 v1(80.8,25.2) ; v1(95.1,25.8) 95.138,25.838 95.61,25.838 U101.19
  Bottom Layer w0.3: v1(80.8,25.2) 94.5,25.2 v1(95.1,25.8)
SWCLK: P?.6 U101.37 | length 15.9
  Top Layer w0.3: v1(87.475,21.2) 87.475,21.239 U101.37
  Bottom Layer w0.3: P?.6 79.02,14.51 79.02,16.347 83.873,21.2 v1(87.475,21.2)
SWDIO: P?.4 U101.34 | length 19.6
  Top Layer w0.3: P?.4 82.76,14.19 82.3,14.65 82.263,14.65 81.631,15.281 81.6,15.313 81.56,15.353 81.56,17.855 v1(83.711,20.006) ; U101.34 90.875,24.075 v1(90.875,22.818)
  Bottom Layer w0.3: v1(83.711,20.006) 88.063,20.006 v1(90.875,22.818)
USB_D_N: D100.4 J100.A7 J100.B7 U101.32 | length 1.7
  Top Layer w0.381: J100.A7 84.026,29.526 84.026,29.865 84.69,30.529 84.69,30.618 84.825,30.752 J100.B7
USB_D_P: D100.3 J100.A6 J100.B6 U101.33 | length 1.7
  Bottom Layer w0.381: J100.B6 83.975,30.752 84.109,30.618 84.109,30.529 84.774,29.865 84.774,29.526 J100.A6
VBUS: D100.2 J100.A4 J100.A9 J100.B4 J100.B9 | length 12.2
  Top Layer w0.3: D100.2 83.15,25.5 82.275,26.375 J100.A9 J100.B4 82.275,30.92 82.45,31.095 82.45,31.105 82.845,31.5 85.955,31.5 86.458,30.997 86.458,30.892 J100.B9 J100.A4
pads on no net: J100.A8 J100.B8 U101.2 U101.3 U101.4 U101.14 U101.15 U101.16 U101.17 U101.20 U101.22 U101.25 U101.26 U101.27 U101.28 U101.29 U101.38 U101.39 U101.40 U101.41 U101.42 U101.44 U101.46

## Polygon pours and split planes (outlines as drawn)
GND on Bottom Layer "GND_L02_P002" (solid, remove dead copper, pour order 2): 0,44.6 133.375,44.6 133.375,2.9 0,2.9
GND on Top Layer "GND_L01_P003" (solid, remove dead copper, pour order 3): 0,47.1 135.075,47.1 135.075,5.4 0,5.4

## Other copper
Top Layer:
  pour cut-out: 84.3,24.85 86.457,24.85 86.457,26.707 86.5,26.75 86.45,26.8 84.275,26.8
  pour cut-out: 105.6,14.714 105.6,14.1 105.675,14.025 106.15,14.025 106.15,14.55

## Silkscreen, mask and mechanical layers (free items; w line width, h text height)
Top Overlay:
  lines w0.254: 73.7,33.1 73.7,33.5 74.1,33.9 ; 75.1,29.5 75.4,29.8 ; 78,29.5 78,29.8 ; 87.6,20.5 87.6,22.6 ; 95.6,13.1 95.6,15.1 96,15.5 ; 97.5,15.7 97.5,15.3 97.9,14.9 ; 99.9,16.7 102,14.6 102,13 ; 109.1,23.2 108.5,23.2 ; 108.5,23.2 108.5,23.2 ; 108.5,23.2 108.7,23.4 108.7,23 108.5,23.2 ; 108.5,23.2 108.5,23.2
Mechanical 1:
  the board outline again, w0.3